# Altium PCB usb_to_full_duplex_rs485.PcbDoc
Units mm, origin at the board's own origin, x right, y up, seen from the top; angles counter-clockwise.
Board outline 21 x 15 mm, 2 copper layers (Top Layer, Bottom Layer); 25 components, 18 nets, 81 pads, 15 vias.
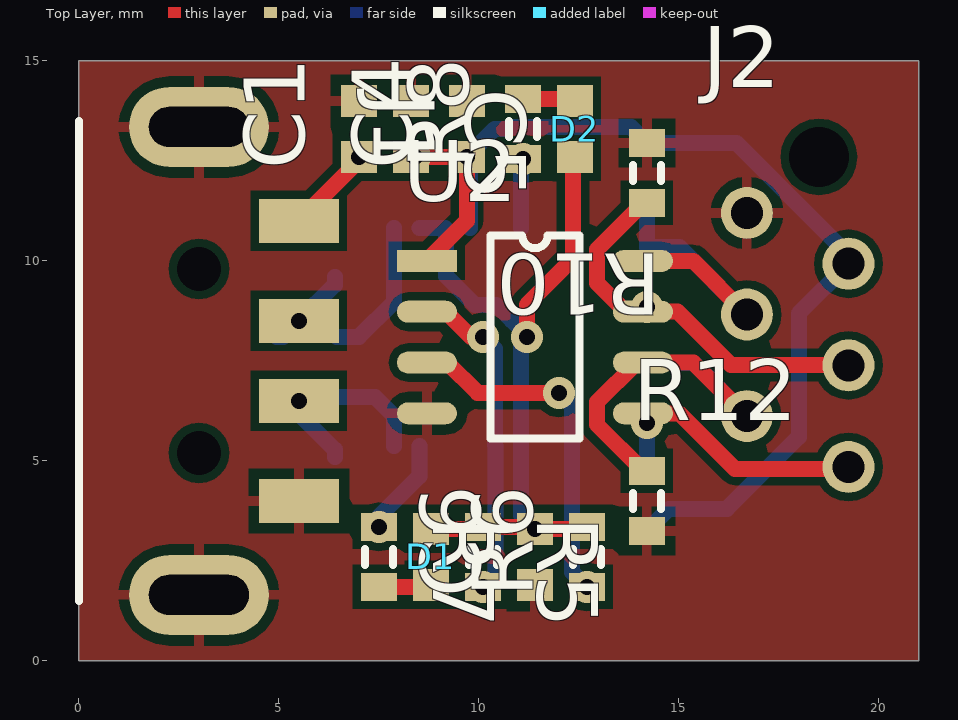
[diagram p0: Top Layer view]
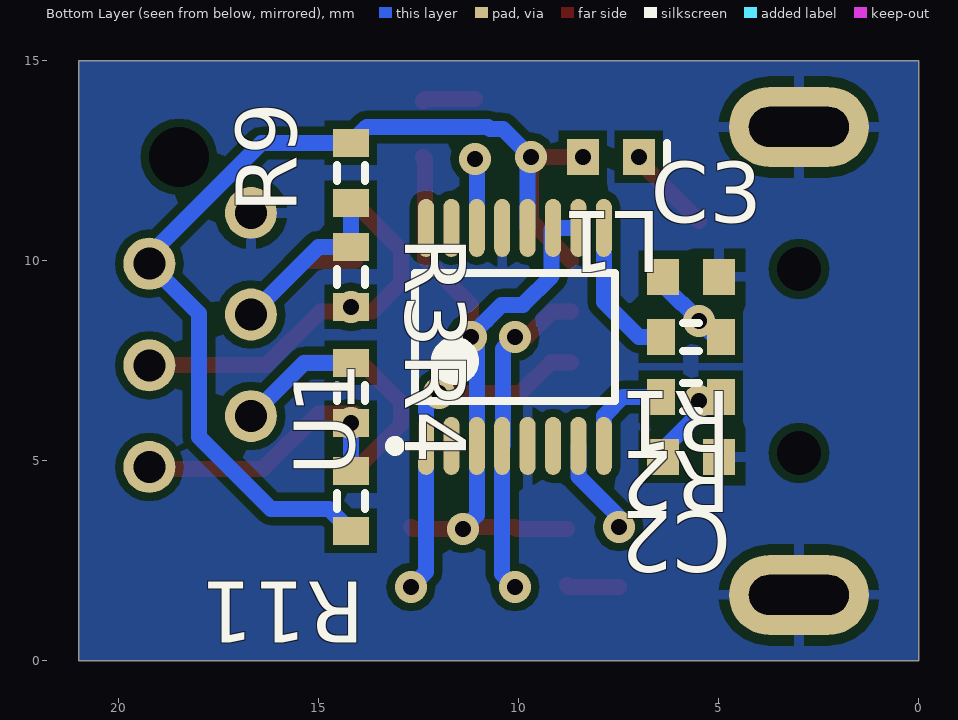
[diagram p1: Bottom Layer view, seen from below]

## Layer stack, top to bottom
Top Solder: solder mask 0.0102, Solder Resist, Dk 3.5
Top Layer: signal copper 0.0356
Dielectric 1: dielectric 0.32, FR-4, Dk 4.8
Bottom Layer: signal copper 0.0356
Bottom Solder: solder mask 0.0102, Solder Resist, Dk 3.5

## Board outline
0,0 21,0 21,15 0,15

## Design rules (kind name [scope] priority, off if disabled: settings)
Clearance [All] p1: gap=0.2
PolygonConnect [All] p1: connectstyle=Relief reliefconductorwidth=0.254 reliefentries=4 polygonreliefangle="90 Angle" airgapwidth=0.254
RoomDefinition usb_to_full_duplex_rs485 [InComponentClass('usb_to_full_duplex_rs485')] p1: confinementstyle=ConfineIn formatcopy=TRUE lockcomponents=FALSE outline -21,0 50,0 50,15 -21,15
RoutingVias [All] p1: holewidth=0.4 width=0.8 viastyle="Through Hole" minholewidth=0.3 minwidth=0.7 maxholewidth=3 maxwidth=4
SolderMaskExpansion [All] p1: expansion=0.102
UnpouredPolygon [All] p1: allowunpoured=FALSE
Width [All] p1: maxlimit=1 minlimit=0.3 preferedwidth=0.4
29 further rules are at their usual default settings.

## Components (designator, comment, footprint, x,y, rotation, side; value= is the part's Value field where it differs from the comment)
C1 "10nF" 1608[0603] 7,13.3 r90 top
C2 "47pF" 1608[0603] 5.7,5.1 r0 bottom
C3 "47pF" 1608[0603] 5.7,9.6 r180 bottom
C4 "100nF" 1608[0603] 9.7,13.3 r90 top
C5 "4.7uF" 1608[0603] 8.3,13.3 r270 top
C6 "100nF" 1608[0603] 11.4,2.6 r90 top
D1 "LED2" 1608[0603] 8.8,2.6 r270 top
D2 "LED2" 1608[0603] 12.4,13.3 r90 top
J1 "USB-A" USB-A-PLUG 5.5,11 r270 top
J2 "RS485" MICRO-MATCH-6 16.7,11.2 r90 top
L1 "Ferrite" INDC1608L 7.7,12.6 r0 bottom
R1 "27R" J1-0603 5.7,8.1 r0 bottom
R2 "27R" J1-0603 5.7,6.6 r0 bottom
R3 "120R" J1-0603 14.2,9.6 r270 bottom
R4 "120R" J1-0603 14.2,6.7 r270 bottom
R5 "10k" J1-0603 10.1,2.6 r270 top
R6 "10k" J1-0603 12.7,2.6 r90 top
R7 "1k" J1-0603 7.5,2.6 r270 top
R8 "1k" J1-0603 11.1,13.3 r90 top
R9 "750R" J1-0603 14.2,12.2 r90 bottom
R10 "750R" J1-0603 14.2,12.2 r270 top
R11 "750R" J1-0603 14.2,4 r270 bottom
R12 "750R" J1-0603 14.2,4 r90 top
U1 "FT230XS" SOP64P600X175-16N 10.1,8.1 r90 bottom
U2 "SN75179B" SOIC-8 8.7,10 r0 top

## Footprints (in the part's own frame and the unit in brackets; to place one, negate y for a bottom-side part, rotate by r counter-clockwise, add the part's x,y. Pads: shape width x height; smd on the part's side, far side on the other; paste and mask are expansions set on the pad)
1608[0603] [mm] "Chip Capacitor, Body 1.6x0.8mm, IPC High Density"
  rect 0.8x0.9 smd: 1(-0.7,0) 2(0.7,0)
  body extent -0.87,-0.48 0.87,0.48, height 1.3
INDC1608L [mm] "Chip Inductor, Body 1.6x0.8mm, IPC High Density"
  rect 0.8x0.9 smd: 1(-0.7,0) 2(0.7,0)
  silkscreen extent -1.4,-0.35 -1.4,0.35, body extent -0.87,-0.48 0.87,0.48, height 0.55
J1-0603 [mm] "Chip Resistor, Body 1.6x0.8mm, IPC High Density"
  rect 0.7x0.9 smd: 1(-0.75,0) 2(0.75,0)
  silkscreen extent -0.2,-0.35 0.2,0.35, body extent -0.85,-0.48 0.85,0.48, height 0.9
MICRO-MATCH-6 [mm]
  round 1.3 hole 0.8: 1(0,0) 2(-1.27,-2.54) 3(-2.54,0) 4(-3.81,-2.54) 5(-5.08,0) 6(-6.35,-2.54)
  round 0 hole 1.5 unplated: drill(1.4,-1.8)
SOIC-8 [mm]
  rect 1.5x0.55 smd: 1(0,0)
  oval 1.5x0.55 smd: 2(0,-1.27) 3(0,-2.54) 4(0,-3.81) 5(5.4,-3.81) 6(5.4,-2.54) 7(5.4,-1.27) 8(5.4,0)
  silkscreen extent 1.58,-4.44 3.82,0.64
SOP64P600X175-16N [mm] "SOP, 16-Leads, Body 4,90x3,90mm, Pitch 0,64mm, IPC Medium Density"
  oval 1.45x0.4 smd: 1(-2.725,2.222) 2(-2.725,1.588) 3(-2.725,0.953) 4(-2.725,0.318) 5(-2.725,-0.317) 6(-2.725,-0.952) 7(-2.725,-1.587) 8(-2.725,-2.222) 9(2.725,-2.222) 10(2.725,-1.588) 11(2.725,-0.953) 12(2.725,-0.318) 13(2.725,0.317) 14(2.725,0.952) 15(2.725,1.587) 16(2.725,2.222)
  silkscreen extent -2.85,-2.5 1.6,3.12, body extent -2,-2.5 2,2.5, height 1.75
USB-A-PLUG [mm]
  round 0 hole 1.1 unplated: 0(1.2,-2.5) 0(5.8,-2.5)
  rect 1.1x2 smd: 1(0,0) 2(2.5,0) 3(4.5,0) 4(7,0)
  rrect100% 2x3.5 hole 1 slot 2.5 at 90 deg unplated: 5(-2.35,-2.5) 6(9.35,-2.5)
  silkscreen extent -2.5,-5.5 9.5,-5.5, body extent -2.5,-20.25 9.5,-1.45, height 3.3

## Part data
C1 C2 C3 C4 C5 C6: library part "Cap Semi", "Capacitor (Semiconductor SIM Model)"
D1 D2: "Typical RED, GREEN, YELLOW, AMBER GaAs LED"
J2: library part HEADER-6
L1: library part Inductor
R1 R2 R3 R4 R5 R6 R7 R8 R9 R10 R11 R12: library part Res3, "Resistor"

## Via types
v1: diameter 0.8, hole 0.4, Top Layer to Bottom Layer, 15 vias

## Nets (pads, with @x,y where several pads share a name; then routed paths per layer and width w, separated by ;. In a path a pad name is that pad's centre, name@x,y a point inside that pad or via, vN(x,y) a via of type N, cw(c..) or ccw(c..) an arc to the next point about the centre after c; other vN are vias at no path point)
A: J2.3 R3.1 R9.1 U2.8 | length 7.5
  Top Layer w0.4: U2.8 15.36,10 J2.3
  Bottom Layer w0.4: R9.1 R3.1 15.01,10.35 J2.3
B: J2.4 R3.2 R10.2 U2.7 | length 9.9
  Top Layer w0.4: v1(14.2,8.85) 14.2,8.83 U2.7 ; R10.2 14.12,11.45 12.95,10.28 12.95,9.45 13.67,8.73 U2.7 ; J2.4 19.23,7.4 16.3,7.4 14.97,8.73 U2.7
  Bottom Layer w0.4: J2.4@19.23,7.4 J2.4
D+: C2.2 J1.3 R2.1 | length 2.4
  Bottom Layer w0.4: R2.1 5.4,6.6 v1(5.5,6.5) 5.5,6.184 6.4,5.284 C2.2
D-: C3.1 J1.2 R1.1 | length 2.2
  Bottom Layer w0.4: R1.1 5.1,8.1 v1(5.5,8.5) 5.5,8.516 5.934,8.95 5.95,8.95 6.4,9.4 C3.1
DM: R1.2 U1.9 | length 3.6
  Bottom Layer w0.4: R1.2 7,8.1 7.878,8.977 U1.9
DP: R2.2 U1.8 | length 2.4
  Bottom Layer w0.4: R2.2 7.4,6.6 7.878,6.122 U1.8
GND: C1.2 C2.1 C3.2 C4.2 C5.1 C6.1 J1.4 J1.5 J1.6 J2.1 R10.1 R12.1 U1.5 U1.13 U2.4
NetD1_2: D1.2 R7.2 | length 1.3
  Top Layer w0.4: R7.2 8.75,1.85 D1.2
NetD2_2: D2.2 R8.2 | length 1.3
  Top Layer w0.4: R8.2 12.35,14.05 D2.2
RXD: R6.1 U1.1 U2.3 | length 8.8
  Top Layer w0.4: U2.3 9.209,7.46 9.969,6.7 v1(12,6.7)
  Bottom Layer w0.4: v1(12,6.7) 12.323,6.377 U1.1 12.323,2.228 v1(12.7,1.85)
RXLED: R8.1 U1.14 | length 1.7
  Bottom Layer w0.4: U1.14 11.053,12.503 v1(11.1,12.55)
TXD: R5.2 U1.4 U2.2 | length 8.2
  Top Layer w0.4: U2.2 9.17,8.73 9.8,8.1 v1(10.1,8.1)
  Bottom Layer w0.4: v1(10.1,1.85) 10.418,2.168 U1.4 10.4,5.392 10.4,7.8 v1(10.1,8.1)
TXLED: R7.1 U1.7 | length 2.4
  Bottom Layer w0.4: v1(7.5,3.35) 7.5,3.6 8.513,4.613 U1.7
VBUS: C1.1 J1.1 L1.1 | length 2.2
  Top Layer w0.4: J1.1 7,12.5 v1(7,12.6)
VCC: C4.1 C5.2 J2.2 L1.2 R9.2 R11.2 U1.12 U2.1 | length 27.2
  Top Layer w0.4: C5.2 v1(8.4,12.6) v1(9.7,12.6) 9.7,11 U2.1
  Bottom Layer w0.4: U1.12 9.783,12.517 v1(9.7,12.6) 10.4,13.3 10.719,13.3 10.769,13.35 13.8,13.35 R9.2 16.435,12.95 19.24,10.145 J2.2 18,8.69 18,5.6 16.2,3.8 14.75,3.8 R11.2
VCCIO: C6.2 D1.1 D2.1 R5.1 R6.2 U1.3 U1.10 U1.11 | length 18.9
  Top Layer w0.4: D1.1 10.05,3.3 R5.1 11.35,3.35 v1(11.4,3.3) 12.65,3.3 R6.2 ; v1(11.2,8.1) 11.2,8.9 12.35,10.05 12.35,12.55 D2.1
  Bottom Layer w0.4: U1.10 U1.11 9.183,10.79 9.183,9.617 9.9,8.9 10.431,8.9 10.816,8.516 ; v1(11.2,8.1) 11.2,8.131 10.816,8.516 ; v1(11.4,3.3) 11.053,3.648 U1.3 11.053,8.279 10.816,8.516
Y: J2.6 R4.2 R11.1 U2.5 | length 7.3
  Top Layer w0.4: v1(14.2,5.95) 14.2,6.09 U2.5 15.01,6.19 16.4,4.8 19.19,4.8 J2.6
  Bottom Layer w0.4: R11.1 v1(14.2,5.95) ; J2.6@19.19,4.8 J2.6
Z: J2.5 R4.1 R12.2 U2.6 | length 10.1
  Top Layer w0.4: R12.2 14.11,4.75 12.95,5.91 12.95,6.47 13.94,7.46 U2.6 15.36,7.46 J2.5
  Bottom Layer w0.4: R4.1 15.37,7.45 J2.5
pads on no net: J1.0 J2.drill U1.2 U1.6 U1.15 U1.16

## Polygon pours and split planes (outlines as drawn)
GND on Top Layer "Top Layer-No Net" (solid, remove dead copper, pour order 2): 0,0 0,15 21,15 21,0
GND on Bottom Layer "Top Layer-No Net" (solid, remove dead copper, pour order 4): 0,0 21,0 21,15 0,15